# EAGLE board FINAL FINAL ECE 411 Chronograph Schematic (EAGLE 9.5.1)
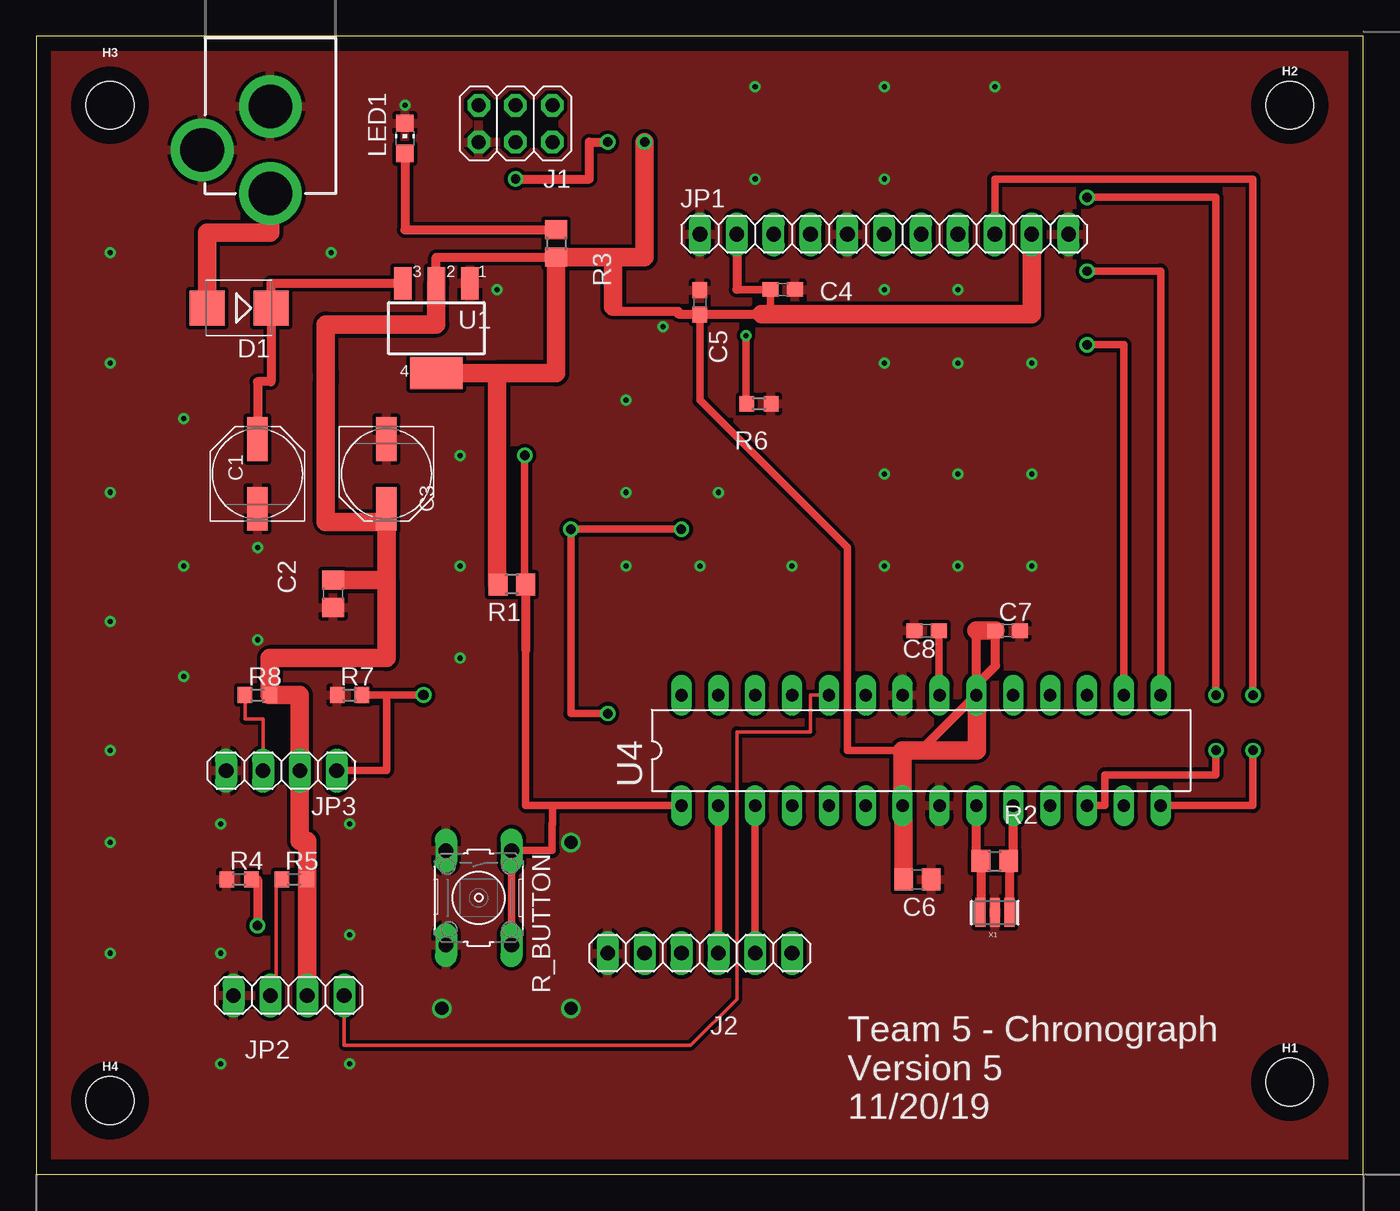
[diagram p0: board, top side]
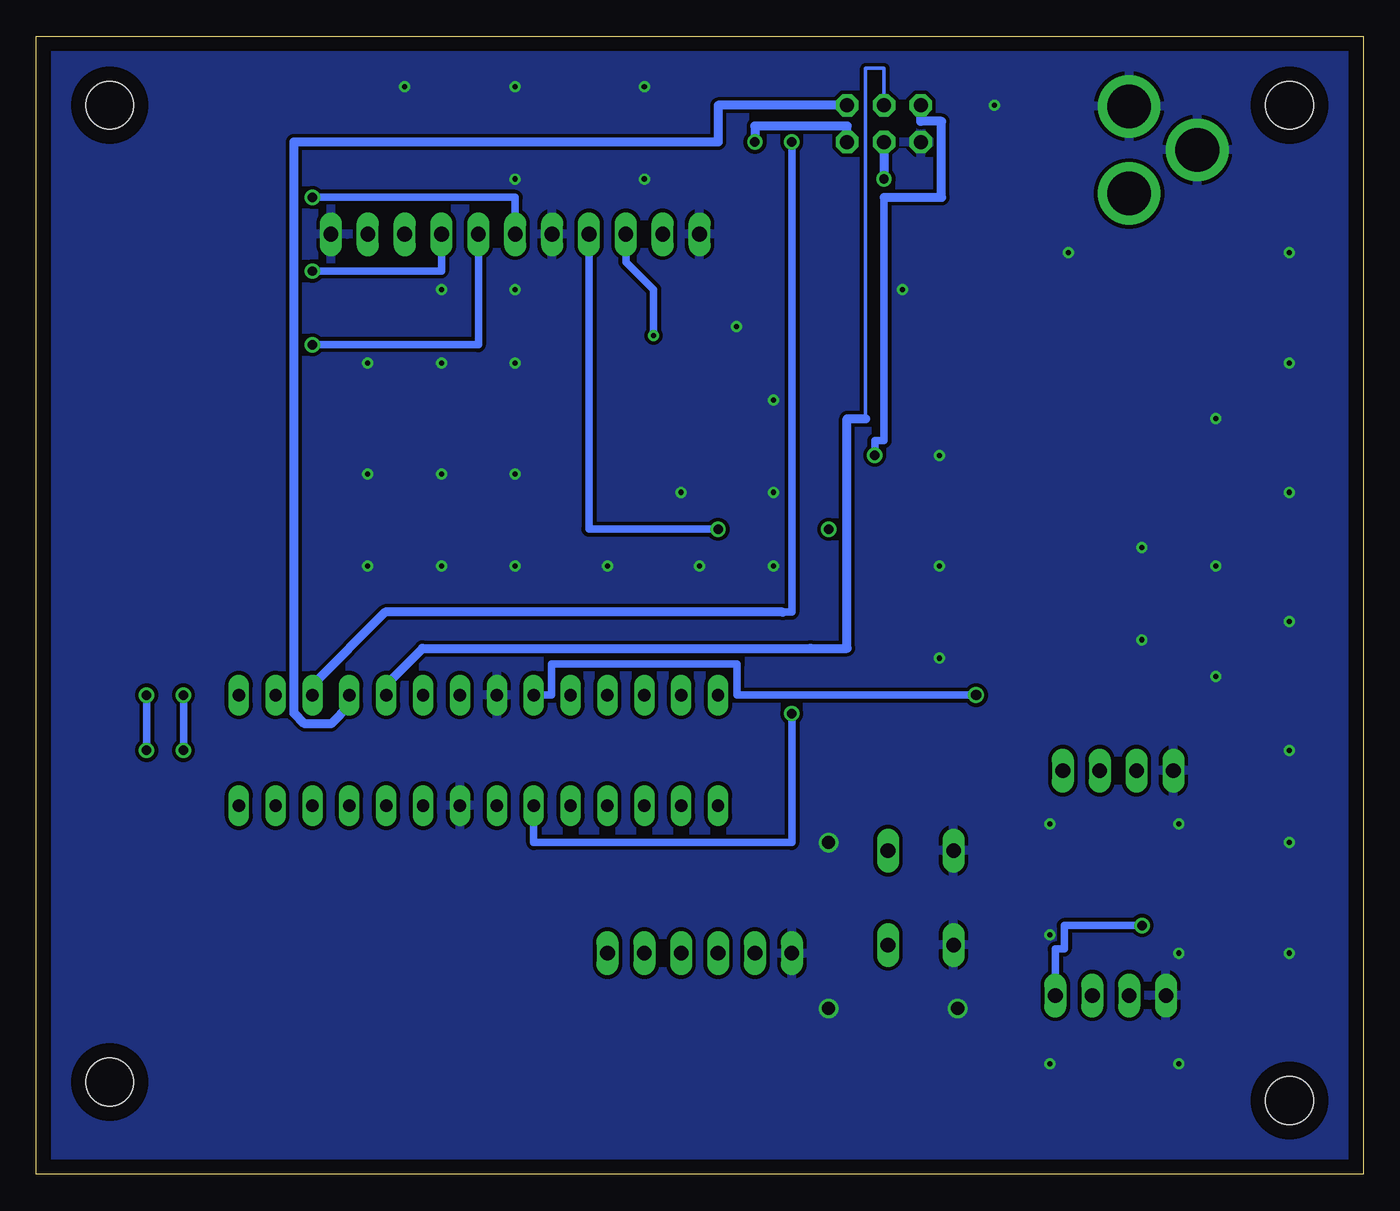
[diagram p1: board, bottom side, seen from below]

Size 91.42 x 78.41 mm. Coordinates in mm from the lower left corner, seen from the top.
Outline: 0,0 91.42,0 91.42,78.41 0,78.41 0,0
Copper layers (1*16): Top 0.035mm / dielectric 1.5mm / Bottom 0.035mm
Design rules "default": minimum track width 6mil, minimum drill 0.35mm, track to track 6mil, track to pad 6mil, pad to pad 6mil, via to via 6mil, smd to smd 6mil, copper to edge 40mil, drill to drill 6mil, minimum pad ring 10mil, minimum via ring 8mil, stop-mask expansion 4mil, vias tented up to drill 0mil, thermal gap 10mil
Net classes: 0 default: width 0.254 mm, clearance 0.254 mm; 1 power: width 0.61 mm, drill 0.61 mm, clearance 0.254 mm; 2 gnd: width 0.305 mm, drill 0.559 mm, clearance 0.254 mm; 3 usbvcc: width 0.508 mm, drill 0.61 mm, clearance 0.254 mm

## Footprints (pad centres in the part's own frame; a part is rotated, then mirrored left to right if it is on the bottom)
PANASONIC_D = smd 3 x 1.4: + 2.4,0; - -2.4,0
C0805 = smd 1.3 x 1.5: 1 -0.95,0; 2 0.95,0
C0603 = smd 1.1 x 1: 1 -0.85,0; 2 0.85,0
SMB = smd 2.4 x 2.4: A 2.2,0; C -2.2,0
STAND-OFF = hole 3.302: 0,0
2X03 = drill 0.95 pad 1.55 octagon: 1 -2.54,-1.27; 2 -2.54,1.27; 3 0,-1.27; 4 0,1.27; 5 2.54,-1.27; 6 2.54,1.27
1X06 = drill 1.016 long: 1 -6.35,0; 2 -3.81,0; 3 -1.27,0; 4 1.27,0; 5 3.81,0; 6 6.35,0
POWER_JACK_PTH = drill 2.997 pad 4.318: GND 0,7.7; GNDBREAK 4.7,10.7; PWR 0,13.7
1X11 = drill 1.016 long: 1 -12.7,0; 2 -10.16,0; 3 -7.62,0; 4 -5.08,0; 5 -2.54,0; 6 0,0; 7 2.54,0; 8 5.08,0; 9 7.62,0; 10 10.16,0; 11 12.7,0
1X04 = drill 1.016 long: 1 -3.81,0; 2 -1.27,0; 3 1.27,0; 4 3.81,0
CHIP-LED0805 = smd 1.2 x 1.2: A 0,-1.05; C 0,1.05
R0805 = smd 1.3 x 1.5: 1 -0.95,0; 2 0.95,0
R0603 = smd 1 x 1.1: 1 -0.85,0; 2 0.85,0
B3F-10XX = drill 1.016 long: 1 -3.251,2.261; 2 3.251,2.261; 3 -3.251,-2.261; 4 3.251,-2.261
SOT223 = smd 1.219 x 2.235: 1 -2.311,-3.099; 2 0,-3.099; 3 2.311,-3.099 | smd 3.6 x 2.2: 4 0,3.099
DIL28-3 = drill 0.85 pad 1.422 long: 1 -16.51,-3.81; 2 -13.97,-3.81; 3 -11.43,-3.81; 4 -8.89,-3.81; 5 -6.35,-3.81; 6 -3.81,-3.81; 7 -1.27,-3.81; 8 1.27,-3.81; 9 3.81,-3.81; 10 6.35,-3.81; 11 8.89,-3.81; 12 11.43,-3.81; 13 13.97,-3.81; 14 16.51,-3.81; 15 16.51,3.81; 16 13.97,3.81; 17 11.43,3.81; 18 8.89,3.81; 19 6.35,3.81; 20 3.81,3.81; 21 1.27,3.81; 22 -1.27,3.81; 23 -3.81,3.81; 24 -6.35,3.81; 25 -8.89,3.81; 26 -11.43,3.81; 27 -13.97,3.81; 28 -16.51,3.81
RESONATOR = smd 0.7 x 2: 1 -1,0; 2 0,0; 3 1,0

## Placement (x,y rotation side)
C1  47u  [PANASONIC_D]  15.24,48.26 90 top
C2  100n  [C0805]  20.45,40.01 90 top
C3  47u  [PANASONIC_D]  24.13,48.26 270 top
C4  100nF  [C0603]  51.44,60.96 180 top
C5  100nF  [C0603]  45.72,60.07 270 top
C6  100n  [C0805]  60.71,20.32 180 top
C7  100nF  [C0603]  66.93,37.47 0 top
C8  100nF  [C0603]  61.34,37.47 180 top
D1  M7  [SMB]  13.97,59.69 180 top
H1  STAND-OFF  [STAND-OFF]  86.36,6.35 0 top
H2  STAND-OFF  [STAND-OFF]  86.36,73.66 0 top
H3  STAND-OFF  [STAND-OFF]  5.08,73.66 0 top
H4  STAND-OFF  [STAND-OFF]  5.08,5.08 0 top
J1  3x2 M  [2X03]  33.02,72.39 180 top
J2  J2  [1X06]  45.72,15.24 180 top
J4  POWER_JACK  [POWER_JACK_PTH]  16.13,81.28 180 top
JP1  LCD  [1X11]  58.42,64.77 0 top
JP2  IR_PAIR1  [1X04]  17.4,12.32 180 top
JP3  IR_PAIR2  [1X04]  16.89,27.81 180 top
LED1  GREEN  [CHIP-LED0805]  25.4,71.37 0 top
R1  10K  [R0805]  32.77,40.64 180 top
R2  1M  [R0805]  66.04,21.59 0 top
R3  1K  [R0805]  35.81,64.14 270 top
R4  10K  [R0603]  13.97,20.32 0 top
R5  100  [R0603]  17.78,20.32 0 top
R6  1K  [R0603]  49.78,53.09 180 top
R7  10K  [R0603]  21.59,33.02 0 top
R8  100  [R0603]  15.24,33.02 0 top
R_BUTTON  [B3F-10XX]  30.48,19.05 270 top
U1  NCP1117ST50T3G  [SOT223]  27.56,58.29 180 top
U4  ATMEGA328P-PU  [DIL28-3]  60.96,29.21 0 top
X1  CSTCE16M0V53-R0 16MHZ  [RESONATOR]  66.04,18.03 180 top

## Library data of the parts
C1-C3 C6 R1-R3 = rcl
C4 C5 C7 C8 = rcl; SPICEPREFIX: C
D1 = diode
H1-H4 = SparkFun-Hardware
J1 U4 X1 = SmartPrj
J2 JP1-JP3 = pinhead
J4 = SparkFun-Connectors; PROD_ID: CONN-08197
LED1 = led
R4-R8 = rcl; SPICEPREFIX: R
R_BUTTON = switch-omron; MPN: B3F-1000; OC_FARNELL: 176432; OC_NEWARK: 36M3542
U1 = linear

## Nets
+5V: C2.2 C3.+ C4.2 C5.2 C6.2 C7.1 J1.2 JP1.2 JP1.10 JP2.2 JP3.2 R1.2 R3.2 R5.2 R8.2 U1.2 U1.4 U4.7 U4.20
D4: JP1.7 U4.16
D5: JP1.8 U4.15
D6: JP1.9 U4.14
GND: C1.- C2.1 C3.- C4.1 C5.1 C6.1 C7.2 C8.2 J1.6 J2.6 J4.GND J4.GNDBREAK JP1.1 JP1.5 JP1.11 JP2.4 JP3.4 LED1.C R4.1 R6.1 R7.1 R_BUTTON.3 R_BUTTON.4 U1.1 U4.8 U4.22 X1.2
IR_PAIR1: JP2.1 R4.2 U4.24
IR_PAIR2: JP3.1 R7.2 U4.23
LCD_E: JP1.6 U4.12
MISO: J1.1 U4.18
MOSI: J1.4 U4.17
N$1: C8.1 U4.21
N$3: LED1.A R3.1
N$4: J2.3 U4.2
N$5: JP1.3 R6.2
N$7: JP2.3 R5.1
N$9: J2.2 U4.3
N$11: JP3.3 R8.1
PWRIN: D1.A J4.PWR
RESET: J1.5 R1.1 R_BUTTON.1 R_BUTTON.2 U4.1
RS: JP1.4 U4.6
SCK: J1.3 U4.19
VIN: C1.+ D1.C U1.3
XTAL1: R2.1 U4.9 X1.3
XTAL2: R2.2 U4.10 X1.1

## Tracks (layer width: path | path; a pad name or v marks a point on that pad's centre or on a via)
+5V  (via drill 0.65)
  Top 0.254: R5.2 19.05,20.32 18.67,20.19 | 18.41,33.02 18.08,33.02 | 31.75,40.64 R1.2
  Top 0.508: 45.72,59.27 45.72,53.34 55.88,43.18 55.88,29.21 59.69,29.21 | 48.26,60.96 C4.2 50.59,59.27 50.8,59.27
  Top 0.61: U1.2 27.56,63.19 R3.2 | 45.72,59.46 45.72,59.27 | C5.2 45.72,59.27 | 45.72,59.27 49.95,59.27 | 45.72,59.27 44.22,59.27 44.22,59.46 39.75,59.46 39.75,59.78 | 19.94,54.61 19.94,55.24 | JP1.2 48.26,60.96 | 59.69,29.21 60.93,29.21 64.77,33.05 64.77,37.47 | U4.20 64.77,33.73 66.08,35.04 C7.1
  Top 1.27: 24.13,40.95 24.13,35.56 16.09,35.56 R8.2 18.08,33.02 18.16,33.02 JP3.2 18.16,22.99 18.67,22.99 18.67,20.19 JP2.2 | 24.13,40.95 C3.+ 24.13,44.96 19.94,44.96 19.94,54.61 19.94,55.19 | v41.91,71.12 41.91,63.19 39.75,63.19 | 39.75,63.19 R3.2 35.81,55.19 31.75,55.19 | 39.75,63.19 39.75,59.78 | 31.75,55.19 31.75,40.64 | C2.2 24.13,40.95 | 49.95,59.27 50.8,59.27 68.58,59.27 JP1.10 | C6.2 59.76,25.4 U4.7 59.69,29.21 64.81,29.21 64.81,33.02 | U1.2 27.56,58.55 19.94,58.55 19.94,55.24 | U1.4 31.75,55.19 | C7.1 64.77,37.47
  Bottom 0.61: J1.2 35.56,72.22 41.91,72.22 v41.91,71.12
D4  (via drill 0.65)
  Top 0.508: v72.39,57.15 74.93,57.15 U4.16
  Bottom 0.508: JP1.7 60.96,57.15 v72.39,57.15
D5  (via drill 0.65)
  Top 0.508: U4.15 77.47,62.23 v72.39,62.23
  Bottom 0.508: v72.39,62.23 63.5,62.23 JP1.8
D6  (via drill 0.65)
  Top 0.508: JP1.9 66.04,68.58 83.82,68.58 v83.82,33.02 | v83.82,29.21 83.82,25.4 U4.14
  Bottom 0.508: v83.82,33.02 v83.82,29.21
GND  (via drill 0.35, 0.9)
  other vias: 45.72,41.91 63.5,41.91 58.42,41.91 52.07,41.91 68.58,41.91 63.5,48.26 40.64,41.91 49.53,74.93 58.42,74.93 66.04,74.93 49.53,68.58 58.42,68.58 58.42,55.88 63.5,55.88 58.42,48.26 68.58,48.26 68.58,55.88 29.21,49.53 29.21,41.91 29.21,35.56 12.7,24.13 12.7,15.24 12.7,7.62 21.59,24.13 21.59,16.51 21.59,7.62 40.64,53.34 46.99,46.99 40.64,46.99 25.4,73.66 31.75,60.96 20.32,63.5 15.24,43.18 15.24,36.83 5.08,63.5 5.08,55.88 5.08,46.99 10.16,52.07 5.08,38.1 10.16,41.91 5.08,29.21 10.16,34.29 5.08,15.24 5.08,22.86 63.5,60.96 58.42,60.96 43.18,58.42 27.94,11.43 36.83,11.43 36.83,22.86
  pour Top: 0,78.74 91.44,78.74 91.44,0 0,0
  pour Bottom: 0,0 91.44,0 91.44,78.74 0,78.74
IR_PAIR1  (via drill 0.65)
  Top 0.254: JP2.1 21.21,8.89 45.09,8.89 48.26,12.06 48.26,30.48 53.34,30.48 53.34,33.02 U4.24
  Top 0.61: R4.2 15.24,20.32 v15.24,17.14
  Bottom 0.508: JP2.1 21.21,15.52 20.6,15.52 20.6,17.14 20.32,17.14 v15.24,17.14
IR_PAIR2  (via drill 0.7)
  Top 0.508: v26.67,33.02 R7.2 24.13,33.02 24.13,27.81 JP3.1
  Bottom 0.508: v26.67,33.02 43.13,33.02 43.13,35.15 55.93,35.15 55.93,33.02 U4.23
LCD_E  (via drill 0.65)
  Top 0.508: v72.39,67.31 81.28,67.31 v81.28,33.02 | U4.12 73.61,25.4 73.61,27.53 81.28,27.53 v81.28,29.21
  Bottom 0.508: JP1.6 58.42,67.31 v72.39,67.31 | v81.28,33.02 v81.28,29.21
MISO
  Bottom 0.61: U4.18 69.85,32.31 71.12,31.04 72.92,31.04 73.66,31.78 73.66,71.12 44.45,71.12 44.45,73.66 J1.1
MOSI  (via drill 0.65)
  Top 0.61: v33.02,68.58 38.1,68.58 38.1,71.12 v39.37,71.12
  Bottom 0.508: v39.37,71.12 39.37,38.73 40.01,38.73
  Bottom 0.61: U4.17 72.39,33.73 67.39,38.73 40.01,38.73 | J1.4 v33.02,68.58
N$1
  Top 0.254: 62.19,33.02 U4.21
  Top 0.508: C8.1 62.19,33.02
N$3
  Top 0.61: R3.1 30.48,65.08 25.4,65.08 LED1.A
N$4
  Top 0.508: J2.3 U4.2
N$5  (via drill 0.35)
  Top 0.508: v48.9,57.78 48.9,53.12 R6.2
  Bottom 0.508: v48.9,57.78 48.9,60.96 50.8,62.87 JP1.3
N$7
  Top 0.254: R5.1 16.51,20.32 16.51,12.7 16.13,12.7 JP2.3
N$9
  Top 0.508: J2.2 U4.3
N$11
  Top 0.254: R8.1 14.39,31.37 15.62,31.37 JP3.3
PWRIN
  Top 1.27: D1.A 11.77,64.9 16.13,64.9 J4.PWR
RESET  (via drill 0.65)
  Top 0.508: 33.72,36.13 33.72,25.4 35.56,25.4 | 35.56,25.4 U4.1 | v33.66,49.53 33.66,40.64 R1.1 | 35.56,25.4 35.56,24.14 35.55,24.14 35.55,22.3 R_BUTTON.1 R_BUTTON.2
  Top 0.61: R1.1 33.72,36.13
  Bottom 0.508: 33.02,67.31 33.02,50.55 33.66,50.55 v33.66,49.53
  Bottom 0.61: J1.5 30.48,72.56 29.05,72.56 29.05,67.31 33.02,67.31
RS  (via drill 0.65)
  Top 0.508: v44.45,44.45 v36.83,44.45 36.83,31.75 v39.37,31.75
  Bottom 0.508: JP1.4 53.34,44.45 v44.45,44.45 | U4.6 57.15,22.86 39.37,22.86 v39.37,31.75
SCK
  Bottom 0.254: 34.29,52.07 34.29,76.2 33.02,76.2 J1.3
  Bottom 0.61: U4.19 67.31,33.73 64.81,36.23 38.1,36.23 38.08,36.23 35.56,36.23 35.56,52.07 34.29,52.07
VIN
  Top 0.61: U1.3 16.17,61.39 D1.C 16.17,54.61 15.24,54.61 C1.+
XTAL1
  Top 0.61: X1.3 65.09,18.03 R2.1 64.77,21.59 U4.9
XTAL2
  Top 0.61: X1.1 67.04,21.59 R2.2 67.31,21.59 U4.10

## Text on the board
tPlace: Team 5 - Chronograph / Version 5 / 11/20/19